# Altium PCB scheme.PcbDoc
Units mil, origin at the board's own origin, x right, y up, seen from the top; angles counter-clockwise.
Board outline 3937.01 x 2440.94 mil, 2 copper layers (Top Layer, Top, Bottom Layer, Bottom); 18 components, 15 nets, 46 pads, 0 vias.
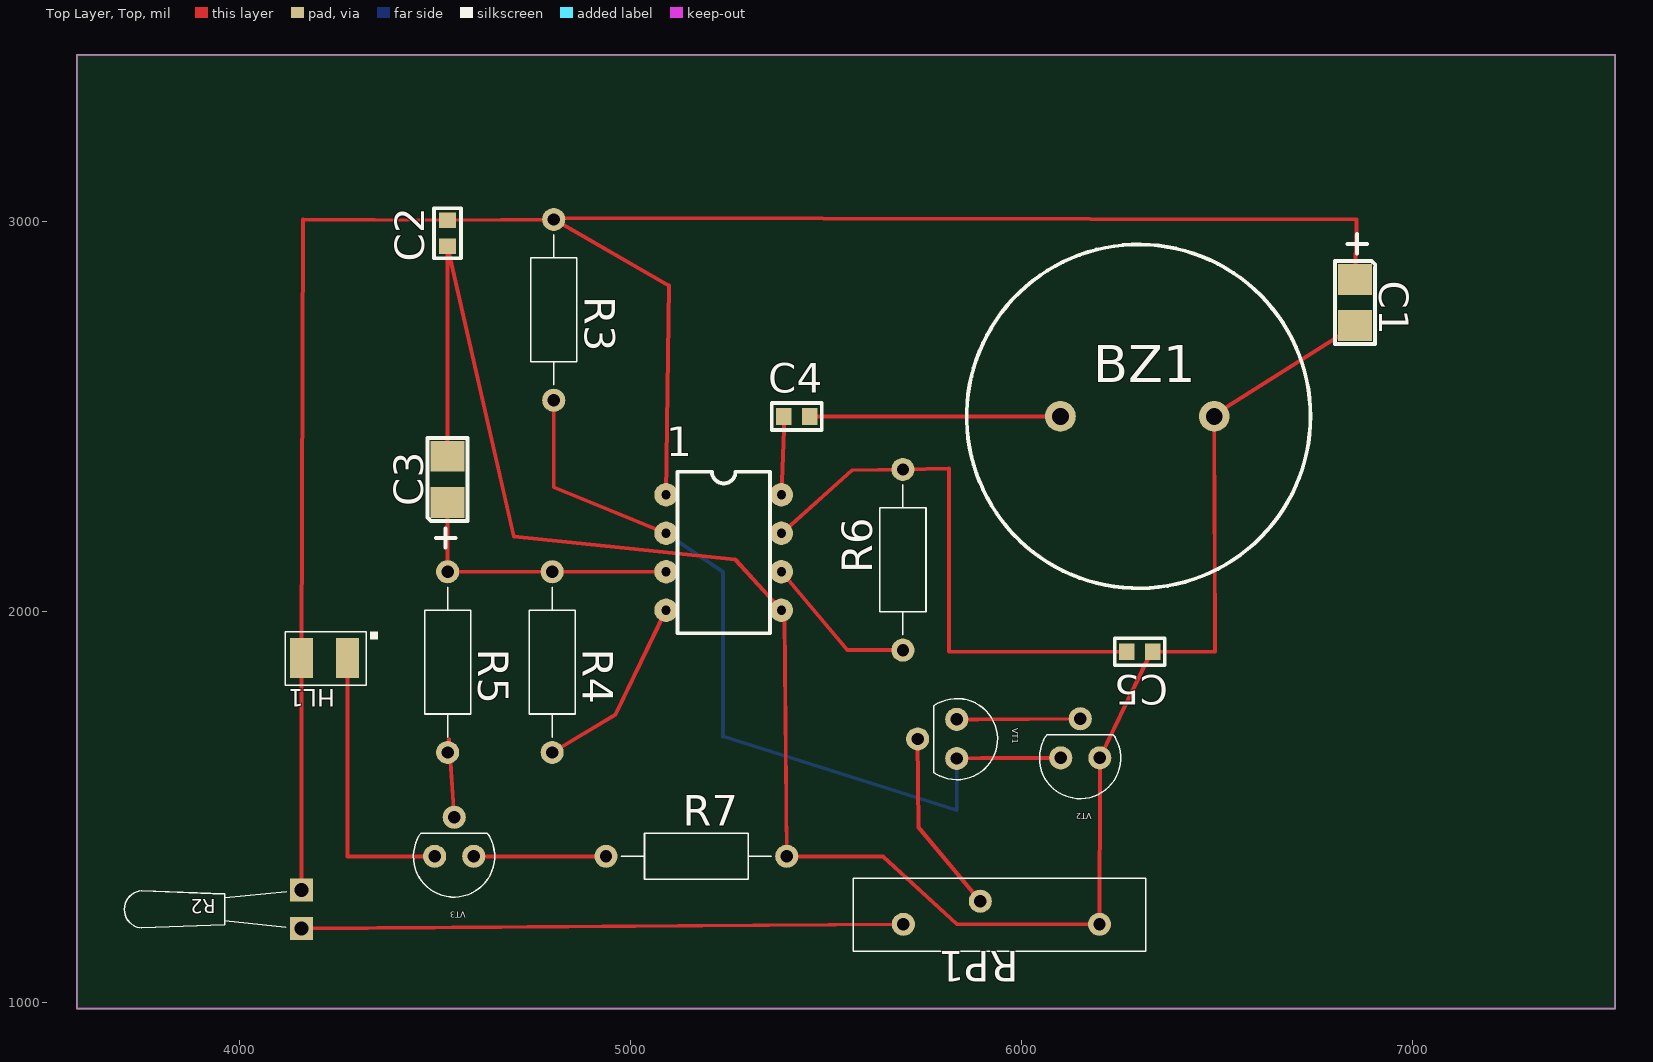
[diagram p0: Top Layer, Top view]
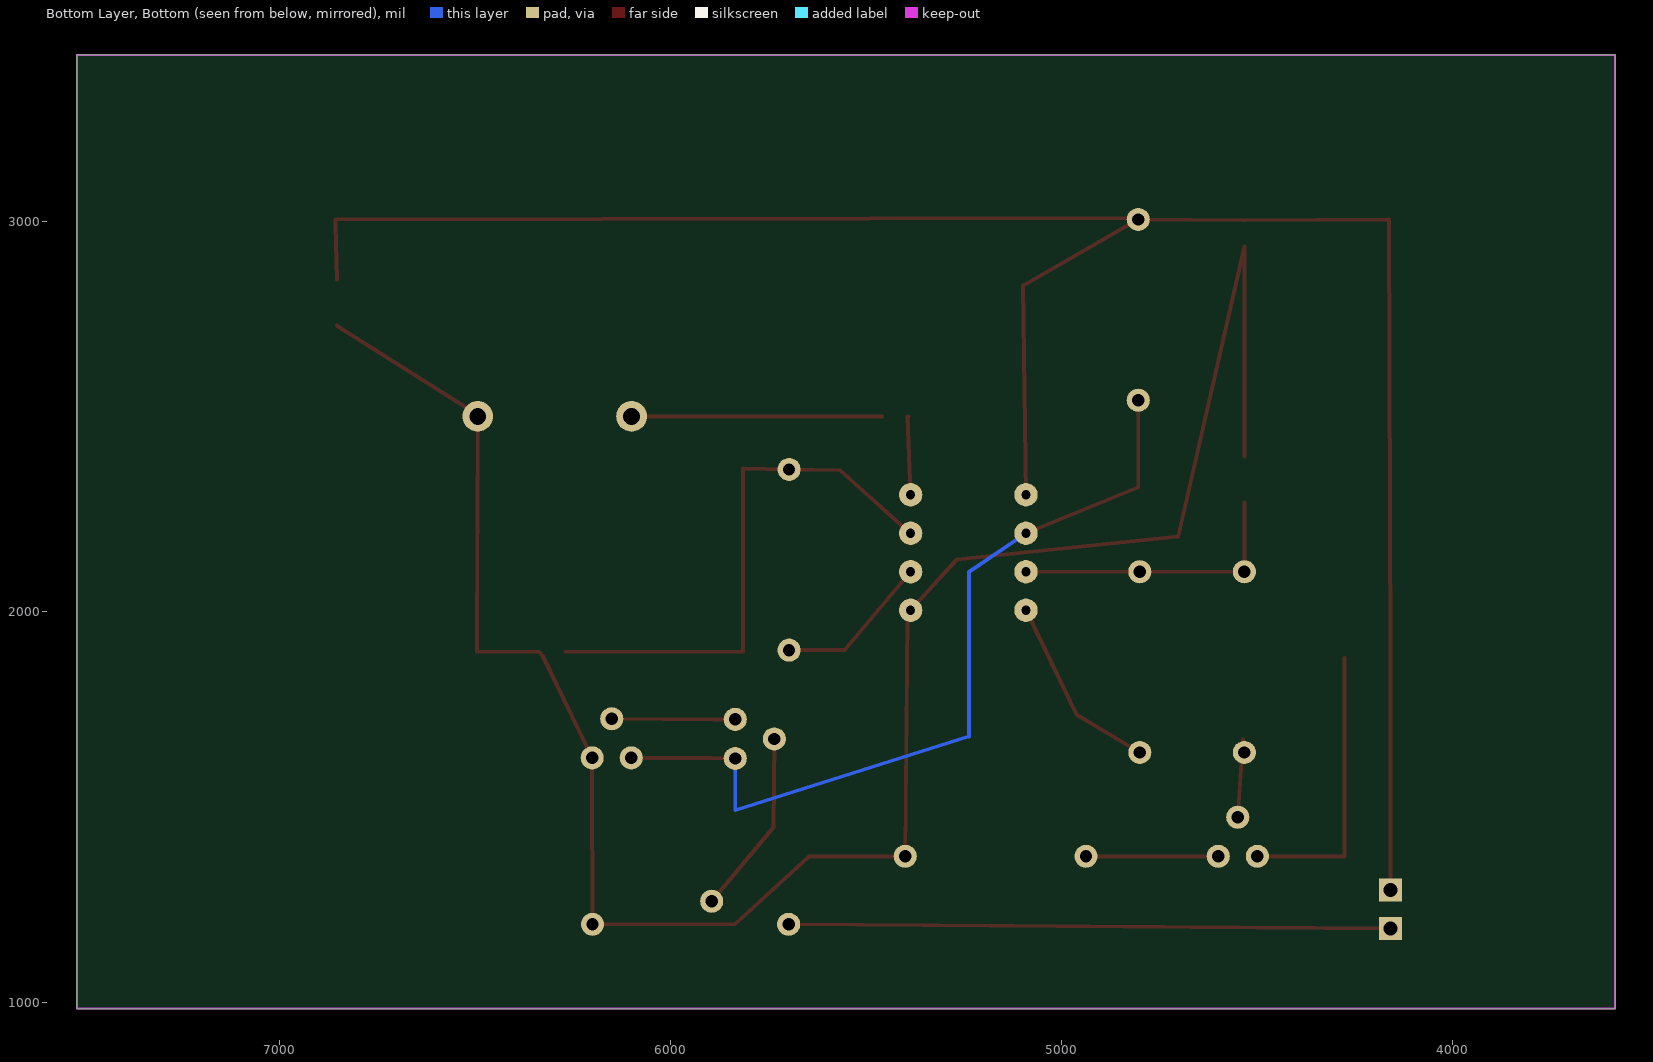
[diagram p1: Bottom Layer, Bottom view, seen from below]

## Layer stack, top to bottom
Top Solder, Top Mask: solder mask 0.4, Solder Resist, Dk 3.5
Top Layer, Top: signal copper 1.4
Dielectric 1: dielectric 12.6, FR-4, Dk 4.8
Bottom Layer, Bottom: signal copper 1.4
Bottom Solder, Bot Mask: solder mask 0.4, Solder Resist, Dk 3.5

## Board outline
3582.68,984.25 7519.69,984.25 7519.69,3425.2 3582.68,3425.2

## Design rules (kind name [scope] priority, off if disabled: settings)
Clearance [All] p1: gap=10 ignorepadtopadclearanceinfootprint=FALSE except(0: Arc-Hole Track-Hole SMDPad-Hole THPad-Hole Via-Hole Fill-Hole Poly-Hole Region-Hole Text-Hole; 11.81: Arc-Arc Arc-Track Arc-THPad Arc-Via Track-Track Track-THPad Track-Via THPad-THPad THPad-Via Via-Via)
PlaneClearance [All] p1: clearance=10
PolygonConnect [All] p1: connectstyle=Relief reliefconductorwidth=10 reliefentries=4 polygonreliefangle="90 Angle" airgapwidth=10
RoutingVias [All] p1: holewidth=28 width=50 viastyle="Through Hole" minholewidth=28 minwidth=50 maxholewidth=28 maxwidth=50
SolderMaskExpansion [All] p1: expansion=4 istentingtop=FALSE
Width [All] p1: maxlimit=10 minlimit=10 preferedwidth=10
29 further rules are at their usual default settings.

## Components (designator, comment, footprint, x,y, rotation, side; value= is the part's Value field where it differs from the comment)
1 "" KP1436AP1 5090.55,2299.21 r0 top
BZ1 "" ZUM1 6100,2500 r0 top
C1 "" CE3528-B 6854.33,2791.34 r270 top
C2 "" CC0603 4531.5,2968.5 r90 top
C3 "" CE3528-B 4531.5,2338.58 r90 top
C4 "" CC0603 5425.2,2500 r0 top
C5 "" CC0603 6303.15,1897.64 r180 top
HL1 "{Value}" 3528_3528(Primary) 4275.59,1881.89 r180 top
R2 "" B57861 4157.48,1188.98 r90 top
R3 "" C2-33H-0.25W 4803.15,3003.94 r270 top
R4 "" C2-33H-0.25W 4799.21,2102.36 r270 top
R5 "" C2-33H-0.25W 4531.5,2102.36 r270 top
R6 "" C2-33H-0.25W 5696.85,1901.57 r90 top
R7 "" C2-33H-0.25W 4937.01,1374.02 r0 top
RP1 "" 3006P 6200,1200 r180 top
VT1 "" TO-92-1 5834.65,1724.41 r270 top
VT2 "" TO-92-1 6200.79,1625.98 r180 top
VT3 "" TO-92-1 4598.43,1374.02 r180 top

## Footprints (in the part's own frame and the unit in brackets; to place one, negate y for a bottom-side part, rotate by r counter-clockwise, add the part's x,y. Pads: shape width x height; smd on the part's side, far side on the other; paste and mask are expansions set on the pad)
3006P [mm]
  round 1.5 hole 0.8: 1(0,0) 2(7.75,-1.5) 3(12.75,0)
  silkscreen extent -3,-3 16,1.75
3528_3528(Primary) [mm]
  rect 1.5x2.6 smd: A(3,0) K(0,0)
  silkscreen extent -1.96,-1.71 4.04,1.79
B57861 [mm]
  rect 1.5x1.5 hole 0.9: 1(0,0) 2(2.5,0)
  silkscreen extent 0.05,0.98 2.45,11.52
C2-33H-0.25W [mm]
  round 1.5 hole 0.8: 1(0,0) 2(11.75,0)
  silkscreen extent 1,-1.5 10.75,1.5
CC0603 [mm]
  rect 1x1.1 smd: 1(-0.85,0) 2(0.85,0)
  silkscreen extent -1.63,-0.87 1.63,0.87
CE3528-B [mm]
  rect 2x2.2 smd: 1(-1.5,0) 2(1.5,0)
  silkscreen extent -4.44,-1.3 2.7,1.3
KP1436AP1 [mm]
  round 1.524 hole 0.6: 1(0,0) 2(0,-2.5) 3(0,-5) 4(0,-7.5) 5(7.5,-7.5) 6(7.5,-5) 7(7.5,-2.5) 8(7.5,0)
  silkscreen extent 0.75,-9 6.75,1.5
TO-92-1 [mm]
  round 1.5 hole 0.8: 1(0,0) 2(1.27,-2.54) 3(2.54,0)
  silkscreen extent -1.35,-1.5 3.92,2.65
ZUM1 [mm]
  round 2 hole 1.1: 1(0,0) 2(10,0)
  silkscreen extent -6.09,-11.18 16.26,11.18

## Nets (pads, with @x,y where several pads share a name; then routed paths per layer and width w, separated by ;. In a path a pad name is that pad's centre, name@x,y a point inside that pad or via, vN(x,y) a via of type N, cw(c..) or ccw(c..) an arc to the next point about the centre after c; other vN are vias at no path point)
+12B: 1.1 C1.1 C2.2 HL1.A R2.2 R3.1 | length 5443.8
  Top Layer, Top w10: R2.2 HL1.A 4161.42,3003.94 C2.2 R3.1 ; 1.1 5098.43,2834.65 R3.1 ; C1.1 6858.27,2988.19 6858.27,3003.94 4811.02,3007.87 R3.1
GND: 1.5 BZ1.2 C1.2 C2.1 C3.2 C5.1 R7.2 RP1.1 VT2.1 | length 5465.7
  Top Layer, Top w10: C3.2 C2.1 4700.79,2192.91 5267.72,2133.86 1.5 5393.7,1992.13 R7.2 5645.67,1374.02 5834.65,1200.79 RP1.1 6200.79,1578.74 VT2.1 6326.77,1885.83 C5.1 6496.06,1897.64 BZ1.2 6500,2507.87 C1.2
NET00000: R2.1 RP1.3 | length 1542.6
  Top Layer, Top w10: R2.1 RP1.3 RP1.3@5700,1200
NET00001: 1.8 C4.1 | length 202.9
  Top Layer, Top w10: 1.8 5393.7,2500 C4.1
NET00003: 1.4 R4.2 | length 485.6
  Top Layer, Top w10: R4.2 4960.63,1736.22 1.4
NET00004: RP1.2 VT1.2 | length 472.9
  Top Layer, Top w10: VT1.2 5736.22,1448.82 RP1.2
NET00005: VT1.1 VT2.2 | length 316.1
  Top Layer, Top w10: VT1.1 5889.76,1724.41 VT2.2
NET00006: 1.2 R3.2 VT1.3 VT2.3 | length 2156.2
  Top Layer, Top w10: R3.2 4803.15,2318.9 1.2 ; VT1.3 5897.64,1625.98 VT2.3
  Bottom Layer, Bottom w10: 1.2 5236.22,2102.36 5236.22,1681.1 5834.65,1492.13 VT1.3
NET00007: HL1.K VT3.3 | length 730.7
  Top Layer, Top w10: HL1.K 4275.59,1374.02 VT3.3
NET00008: R7.1 VT3.1 | length 338.6
  Top Layer, Top w10: VT3.1 R7.1
NET00009: BZ1.1 C4.2 | length 641.3
  Top Layer, Top w10: C4.2 BZ1.1
NET00010: 1.6 R6.1 | length 404.4
  Top Layer, Top w10: 1.6 5555.12,1901.57 R6.1
NET00011: 1.7 C5.2 R6.2 | length 1413.9
  Top Layer, Top w10: 1.7 5566.93,2362.2 R6.2 5814.96,2366.14 5814.96,1897.64 C5.2
NET00012: R5.2 VT3.2 | length 233.3
  Top Layer, Top w10: R5.2 4535.43,1673.23 VT3.2
NET00013: 1.3 C3.1 R4.1 R5.1 | length 736.2
  Top Layer, Top w10: C3.1 R5.1 R4.1 1.3

## Keep-outs
Keep-Out Layer, Board:
  the board outline again, w5

## Text inside footprints (layer, text, board x,y; h text height)
VT1: Mechanical 1, Top Assy "C" at 5865.75,1634.25 h12.3 r270; Mechanical 1, Top Assy "E" at 5865.75,1752.36 h12.3 r270; Mechanical 1, Top Assy "BASE" at 5785.43,1694.88 h12.3 r270
VT2: Mechanical 1, Top Assy "C" at 6110.63,1594.88 h12.3 r180; Mechanical 1, Top Assy "E" at 6228.74,1594.88 h12.3 r180; Mechanical 1, Top Assy "BASE" at 6171.26,1675.2 h12.3 r180
VT3: Mechanical 1, Top Assy "C" at 4508.27,1342.91 h12.3 r180; Mechanical 1, Top Assy "E" at 4626.38,1342.91 h12.3 r180; Mechanical 1, Top Assy "BASE" at 4568.9,1423.23 h12.3 r180